# EAGLE board step-up (EAGLE 9.6.2)
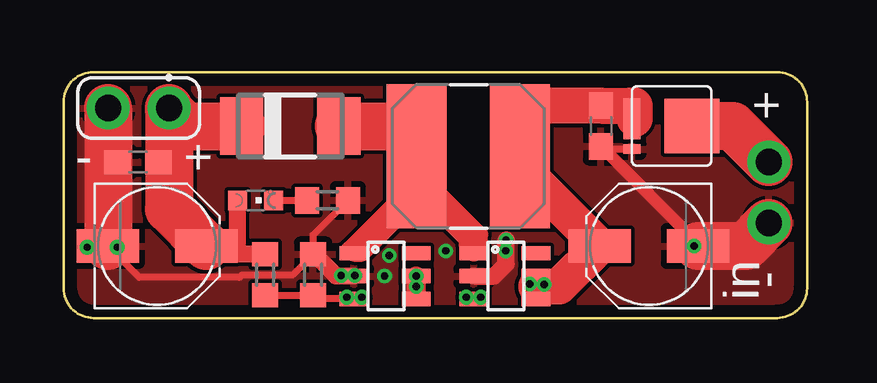
[diagram p0: board, top side]
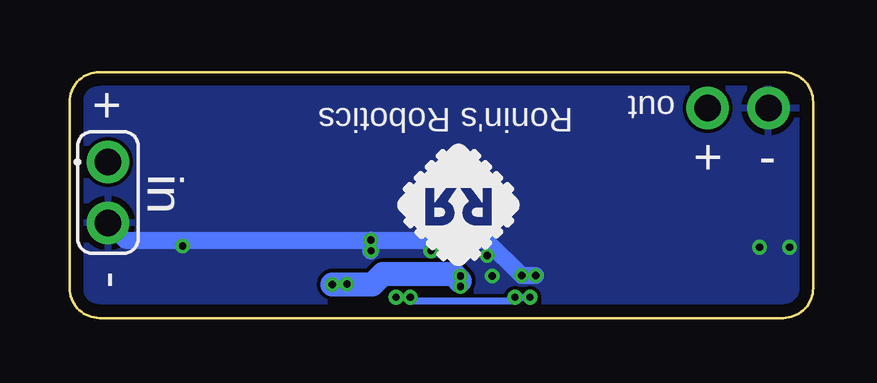
[diagram p1: board, bottom side, seen from below]

Size 31 x 10.25 mm. Coordinates in mm from the lower left corner, seen from the top.
Outline: 1.25,10.25 arc90 0,9 0,1.25 arc90 1.25,0 29.75,0 arc90 31,1.25 31,9 arc90 29.75,10.25 1.25,10.25
Copper layers (1*16): Top 0.035mm / dielectric 1.6mm / Bottom 0.035mm
Design rules "Elecrow_2-layer_PCB_eagle_rule": minimum track width 6mil, minimum drill 12mil, track to track 6mil, track to pad 6mil, pad to pad 6mil, via to via 8mil, smd to smd 0mil, copper to edge 20mil, drill to drill 10mil, minimum pad ring 6mil, minimum via ring 6mil, stop-mask expansion 0mil, vias tented up to drill 100mil, thermal gap 10mil

## Footprints (pad centres in the part's own frame; a part is rotated, then mirrored left to right if it is on the bottom)
PANASONIC_C = smd 2.6 x 1.4: + 2.05,0; - -2.05,0
C0603 = smd 1.1 x 1: 1 -0.85,0; 2 0.85,0
DO-214AC = smd 1.8 x 2.4: A 2.025,0; C -2.025,0
0603_LED_GREEN = smd 0.8 x 0.8: A 0,-0.75; C 0,0.75
SRN6045 = smd 2.5 x 6: 1 -2.175,0; 2 2.125,0
DFN-8_3X3 = smd 2.29 x 2.29: D 0,0.8 | smd 0.4 x 0.7: G 0.96,-1.7 | smd 1.7 x 0.7: S -0.3,-1.7
R0603 = smd 1 x 1.1: 1 -0.85,0; 2 0.85,0
SOT23-6 = smd 0.6 x 1.2: 1 -0.95,-1.3; 2 0,-1.3; 3 0.95,-1.3; 4 0.95,1.3; 5 0,1.3; 6 -0.95,1.3
1X2 = drill 1.092 pad 1.778: P$1 0,0; P$2 2.54,0

## Placement (x,y rotation side)
C1  100uf  [PANASONIC_C]  3.9,3 0 top
C2  100uf  [PANASONIC_C]  24.4,3 180 top
C3  100nf  [C0603]  3.1,6.5 180 top
C4  100nf  [C0603]  22.4,8 270 top
D1  DIODEAC2  [DO-214AC]  9.45,8 0 top
L1  LED0603_R  [0603_LED_GREEN]  8,4.9 270 top
L2  0  [SRN6045]  16.9,6.75 0 top
Q1  AON7401  [DFN-8_3X3]  25.4,8 270 top
R1  1k  [R0603]  11,4.9 0 top
R2  1k  [R0603]  8.4,1.8 90 top
R3  1k  [R0603]  10.4,1.8 270 top
U$1  SB628  [SOT23-6]  18.4,1.75 270 top
U$2  SB628  [SOT23-6]  13.4,1.75 270 top
U$3  1X2  [1X2]  4.4,8.75 180 top
U$4  1X2  [1X2]  29.4,6.5 270 bottom

## Library data of the parts
C1-C4 D1 L1 R1-R3 = pasif_com1
L2 = SparkFun-Coils; PROD_ID: NDUC-11627
Q1 = AON7401
U$1 U$2 = icv1
U$3 U$4 = header_3d

## Nets
FB: R2.1 R3.2 U$1.3 U$2.3
GND: C1.- C2.- C3.2 C4.2 Q1.G R1.2 R3.1 U$1.2 U$2.2 U$3.P$2 U$4.P$2
N$1: Q1.D U$4.P$1
N$2: L1.C R1.1
SW: D1.A L2.1 U$1.1 U$2.1
V+: C2.+ C4.1 L2.2 Q1.S U$1.4 U$1.5 U$2.4 U$2.5
VOUT: C1.+ C3.1 D1.C L1.A R2.2 U$3.P$1

## Tracks (layer width: path | path; a pad name or v marks a point on that pad's centre or on a via)
FB  (via drill 0.3)
  Top 0.3: R2.1 R3.2 10.4,0.8 U$2.3 12.1,0.86 v11.8,0.86 | v17.39,0.87 17.39,0.8 U$1.3
  Bottom 0.3: v11.8,0.86 v12.43,0.86 12.59,0.71 16.63,0.71 v16.79,0.87 v17.39,0.87 | v11.8,0.86
GND  (via drill 0.3)
  Top 0.152: 11.36,1.75 11.43,1.83 v11.57,1.76
  Top 0.3: R1.2 10.4,3.45 R3.1 9.54,1.79 7.42,1.79 7.33,1.7 3.16,1.7 C1.- | Q1.G 22.51,7.04 C4.2
  Top 0.508: C4.2 26.45,3.1 C2.-
  Top 0.7: C3.2 1.86,6.89 U$3.P$2 | U$2.2 11.36,1.75 10.46,2.65 R3.1 | U$1.2 17.95,1.75 18.45,2.25 v18.45,3.25
  Top 2: U$4.P$2 28.44,3 C2.- | U$3.P$2 C1.-
  Bottom 0.7: U$4.P$2 28.69,3.25 v18.45,3.25 | v18.43,2.8 18.43,3.23 v18.45,3.25 | v18.45,3.25 13.63,3.25 v12.15,1.76 v11.57,1.76
  other vias: 15.93,2.8 13.38,1.75 13.58,2.6 0.98,2.95 2.23,2.95 26.28,3
  pour Bottom: -1,11 32,11 32,-1 -1,-1
  pour Top: 32,11 -1,11 -1,-1 32,-1
N$1
  Top 2: U$4.P$1 27.9,8 Q1.D
N$2
  Top 0.3: L1.C R1.1
SW
  Top 0.7: 15.09,4.56 15.54,4.56 16.84,3.26 16.84,2.96 U$1.1 17.34,2.94 17.34,3.47 15.4,5.41 14.57,5.41 14.57,6.6 L2.1 | L2.1 14.72,4.98 12.44,2.7 U$2.1 11.95,2.85 11.92,2.85 14.72,5.65 L2.1
  Top 1.5: 14.72,7.92 14.79,7.98
  Top 2: L2.1 14.72,7.92 14.64,8 D1.A
V+  (via drill 0.3)
  Top 0.152: U$2.4 14.78,0.91 v14.7,1.31 | v19.43,1.41 19.51,1.37 19.7,1.37 | 23.62,8.85 23.62,8.38 Q1.S | U$1.4 19.81,0.91 19.7,0.91
  Top 0.508: 19.7,0.81 19.7,0.91 19.7,1.31 19.7,1.37 U$1.5 v20.04,1.41 v20.04,1.4
  Top 0.813: 14.7,0.96 v14.7,1.31 U$2.5
  Top 1.5: 19.22,8.85 19.21,8.86 | 19.21,8.86 19.02,8.67 L2.2 19.02,6.33 C2.+ 20.66,1.31 19.7,1.31 | 19.21,8.86 19.21,8.85 C4.1 23.62,8.85 23.8,8.85 23.8,8.3
  Bottom 0.152: v14.7,1.31 14.78,1.37 14.73,1.54
  Bottom 1: v20.04,1.4 18.38,1.4 17.94,1.84 15.02,1.84 14.73,1.54
  other vias: 14.7,1.75
VOUT
  Top 0.152: 7,2.75 6.86,2.9 C1.+
  Top 0.7: C3.1 4.4,6.95 U$3.P$1 | R2.2 6.89,2.65 7,2.75 7.23,2.99 7.23,4.88 L1.A | 6.3,2.65 C1.+
  Top 2: D1.C 5.06,8 4.4,8.66 U$3.P$1 4.4,4.55 C1.+

## Text on the board
tPlace: + | - | + | in | -
bPlace: out | Ronin's Robotics | + | - | + | in | -